# EAGLE board SparkFun NEO-F9P-Panel (EAGLE 9.6.2), part 1 of 3
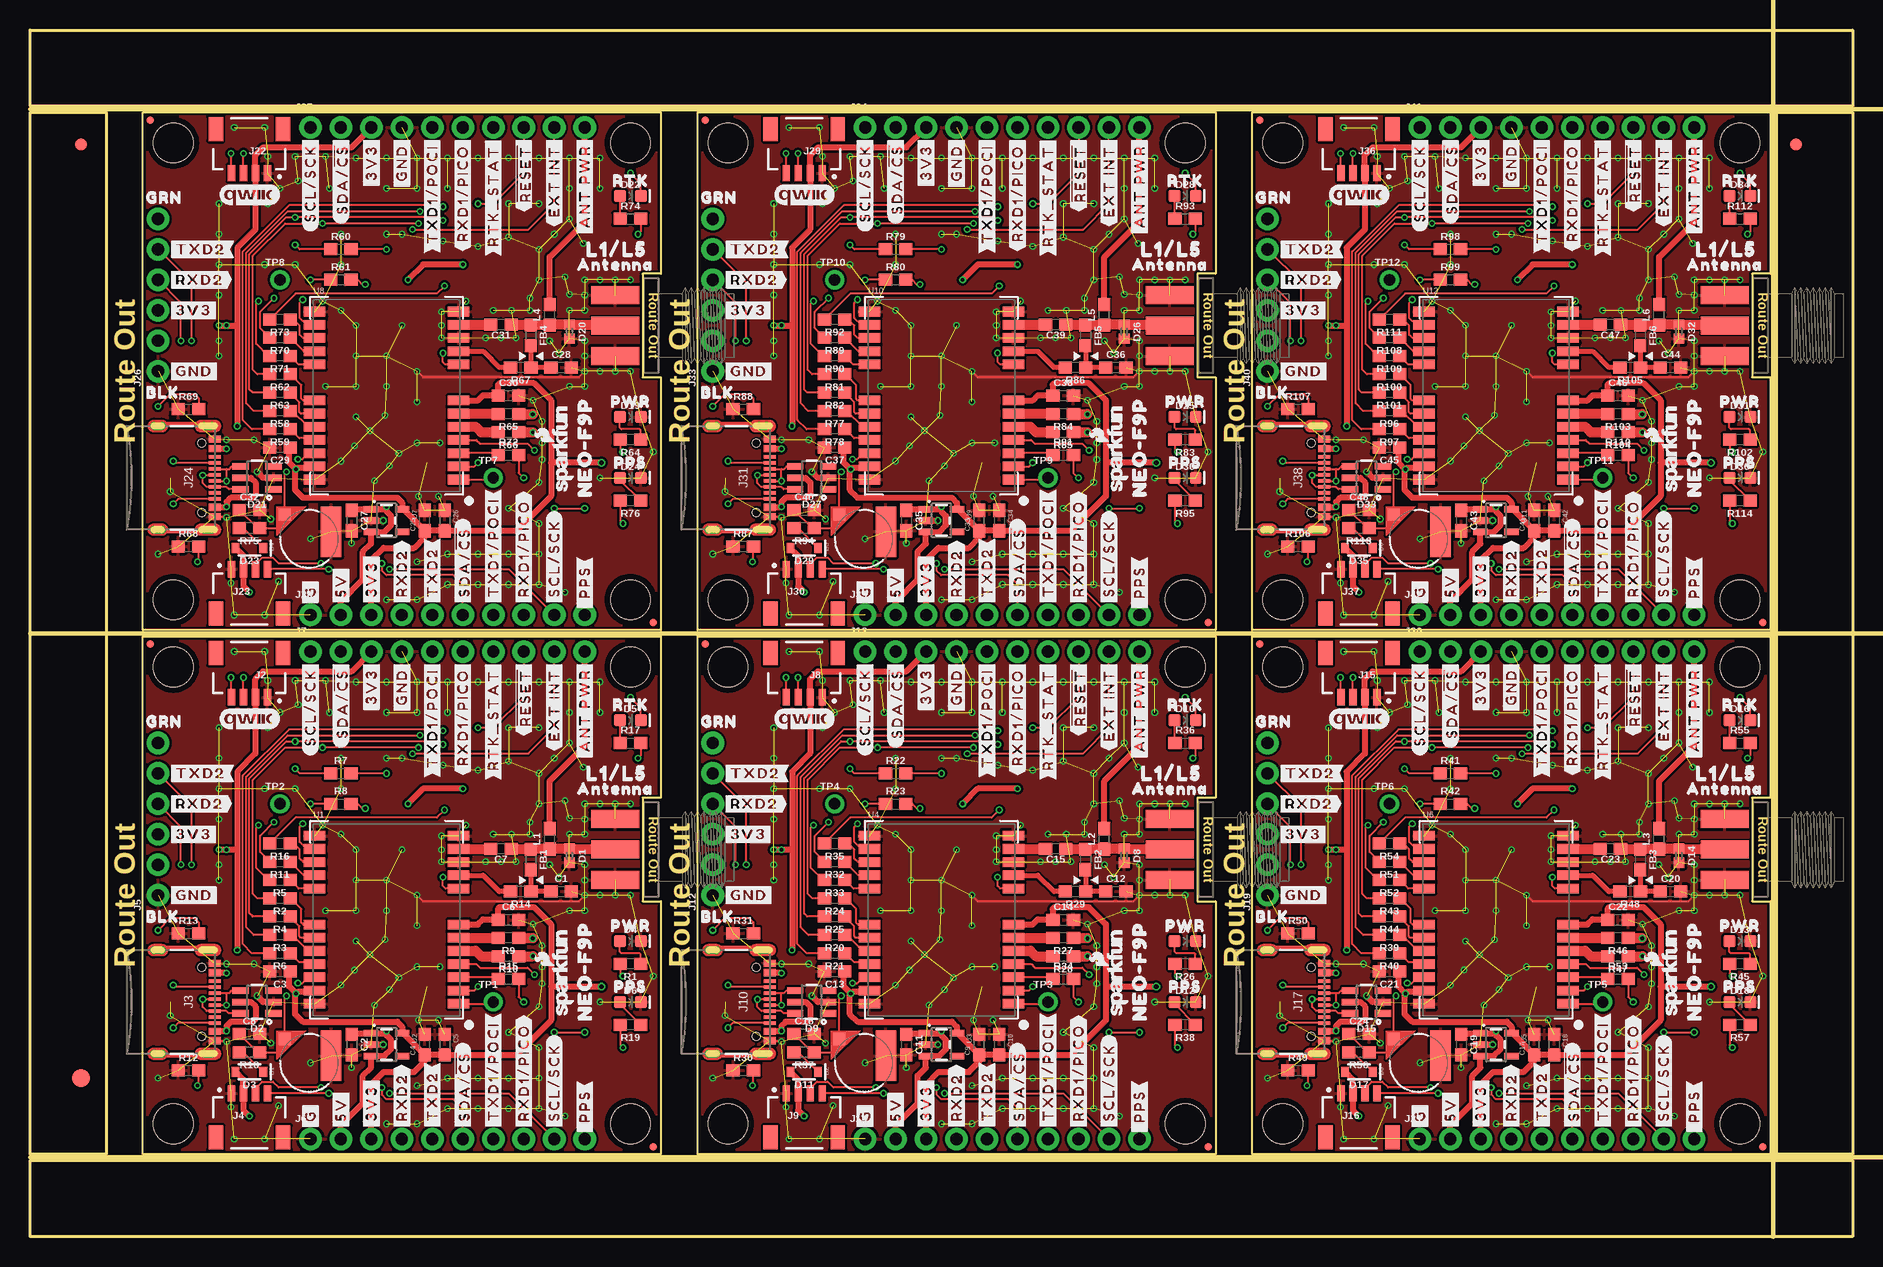
[diagram p0: board, top side]
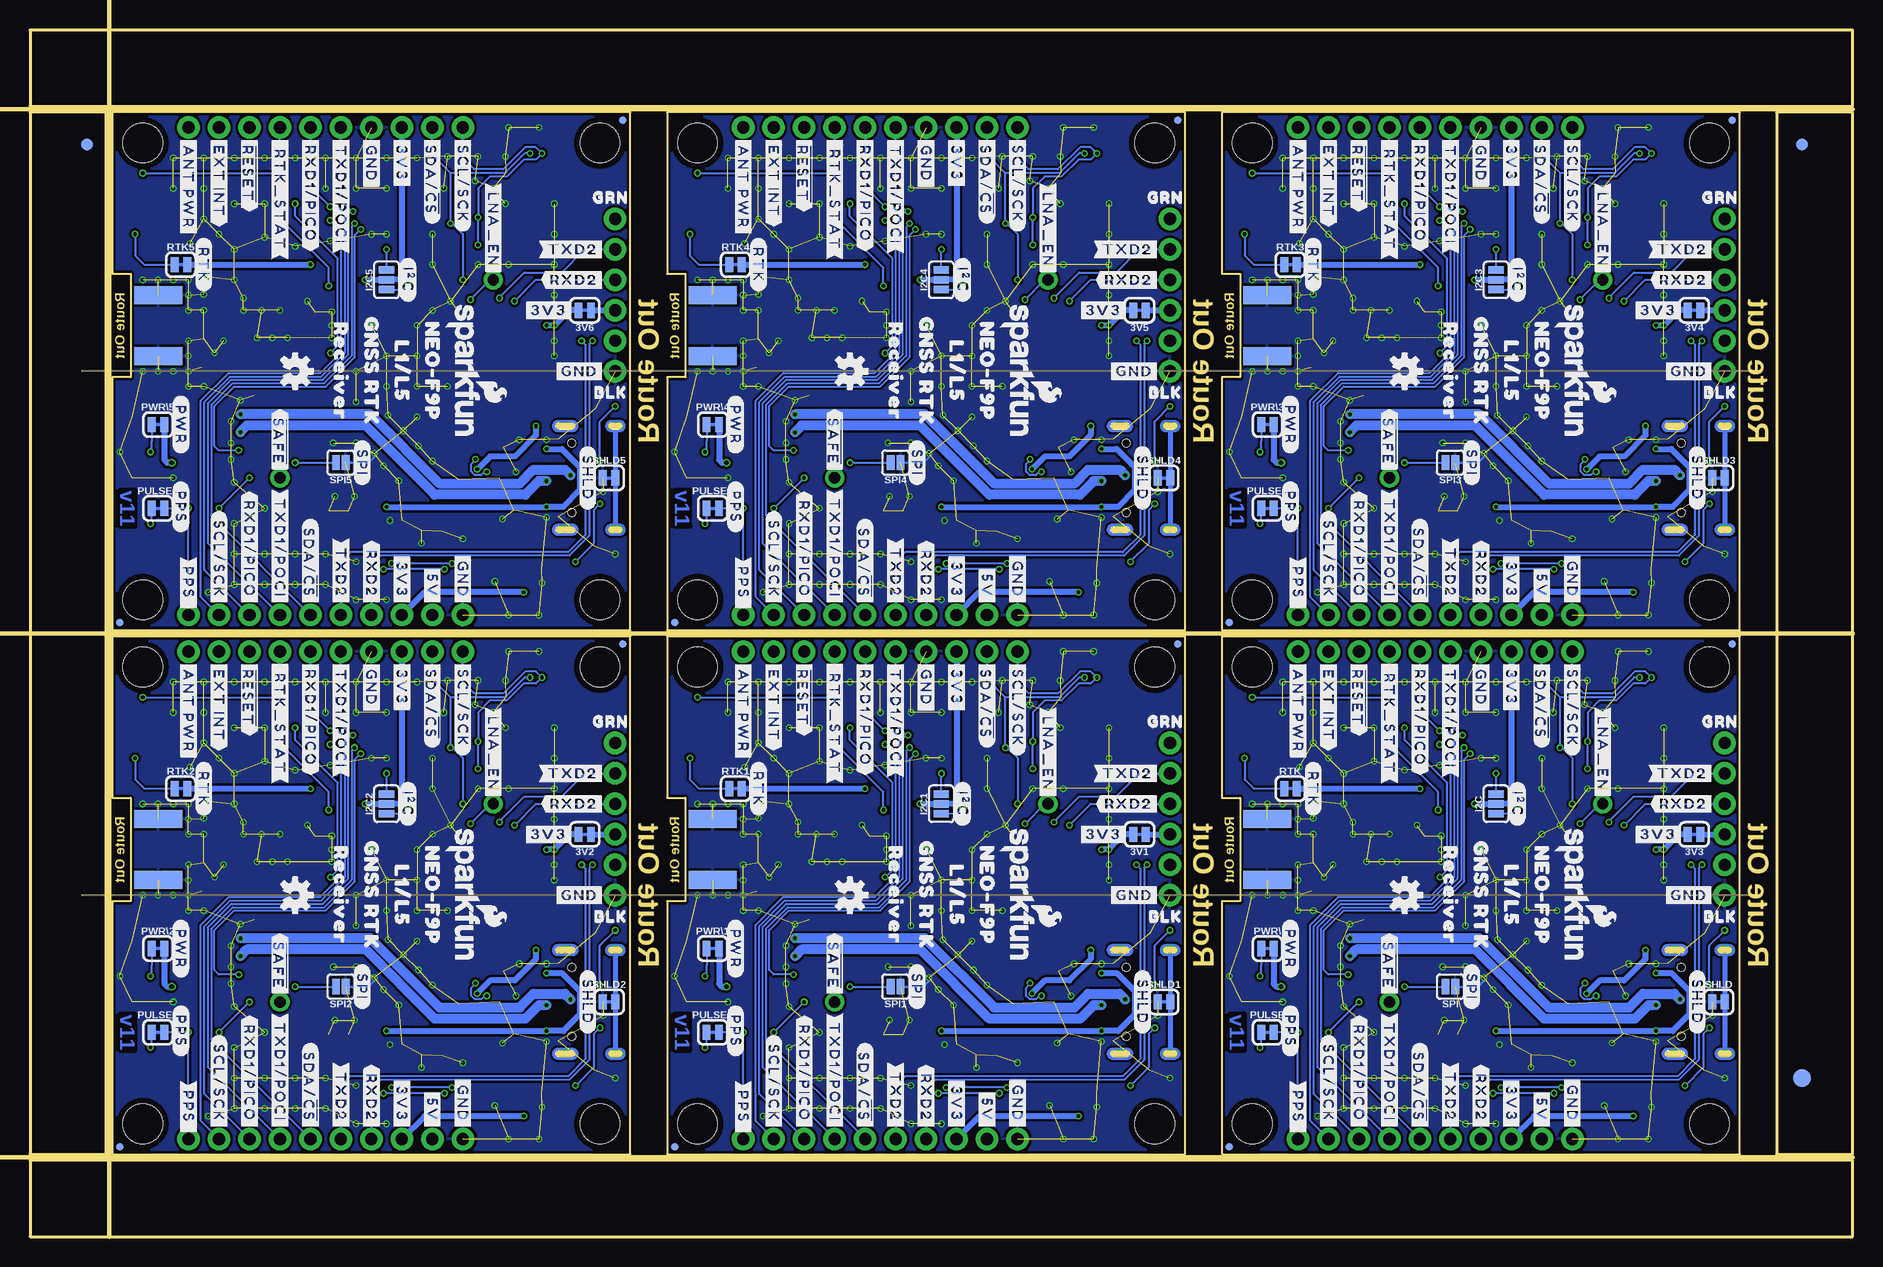
[diagram p1: board, bottom side, seen from below]

Size 151.89 x 100.58 mm. Coordinates in mm from the lower left corner, seen from the top.
Outline: 9.4,6.86 9.4,50.04 52.58,50.04 52.58,36.58 51.05,36.58 51.05,27.94 52.58,27.94 52.58,6.86 9.4,6.86
Outline: 55.63,6.86 55.63,50.04 98.81,50.04 98.81,36.58 97.28,36.58 97.28,27.94 98.81,27.94 98.81,6.86 55.63,6.86
Outline: 101.85,6.86 101.85,50.04 145.03,50.04 145.03,36.58 143.51,36.58 143.51,27.94 145.03,27.94 145.03,6.86 101.85,6.86
Outline: 9.4,50.55 9.4,93.73 52.58,93.73 52.58,80.26 51.05,80.26 51.05,71.63 52.58,71.63 52.58,50.55 9.4,50.55
Outline: 55.63,50.55 55.63,93.73 98.81,93.73 98.81,80.26 97.28,80.26 97.28,71.63 98.81,71.63 98.81,50.55 55.63,50.55
Outline: 101.85,50.55 101.85,93.73 145.03,93.73 145.03,80.26 143.51,80.26 143.51,71.63 145.03,71.63 145.03,50.55 101.85,50.55
Outline: 0,6.35 151.89,6.35 151.89,0 0,0 0,6.35
Outline: 145.54,93.73 151.89,93.73 151.89,6.86 145.54,6.86 145.54,93.73
Outline: 0,100.58 151.89,100.58 151.89,94.23 0,94.23 0,100.58
Outline: 0,93.73 6.35,93.73 6.35,6.86 0,6.86 0,93.73
Copper layers (1*16): Top 0.035mm / dielectric 1.5mm / Bottom 0.035mm
Design rules "SparkFun NEO-F9P": minimum track width 5mil, minimum drill 0.3mm, track to track 5mil, track to pad 5mil, pad to pad 5mil, via to via 5mil, smd to smd 5mil, copper to edge 7mil, drill to drill 7mil, minimum pad ring 5mil, minimum via ring 5mil, stop-mask expansion 2.5mil, vias tented up to drill 25mil, thermal gap 10mil
Net classes: 2 3.3V: width 0.508 mm
tRestrict: 12 lines
Milling: 4 lines

## Footprints (pad centres in the part's own frame; a part is rotated, then mirrored left to right if it is on the bottom)
SMT-JUMPER_2_NC_TRACE_SILK = smd 0.66 x 1.27: 1 -0.521,0; 2 0.521,0
ML414H_IV01E = smd 1 x 1: + 2.022,2.032 | smd 4.2 x 1.7: - 0.6,-1.85
0603 = smd 1.1 x 1: 1 -0.85,0; 2 0.85,0
0402 = smd 0.85 x 0.9: 1 -0.58,0; 2 0.58,0
SOT-23-6 = smd 0.55 x 1.35: 1 -0.95,-1.375; 2 0,-1.375; 3 0.95,-1.375; 4 0.95,1.375; 5 0,1.375; 6 -0.95,1.375
SOD-323 = smd 0.63 x 0.83: A 1.15,0; C -1.15,0
LED-0603 = smd 1 x 1: A -0.877,0; C 0.877,0
FIDUCIAL-1X2 = smd 1 x 1: 1 0,0
FIDUCIAL-1.5X3 = smd 1.5 x 1.5: 1 0,0
SMT-JUMPER_3_NO_SILK = smd 0.635 x 1.27: 1 -0.813,0; 2 0,0; 3 0.813,0
SMA-EDGE = smd 1.5 x 4: GND@0 -2.54,0; GND@1 2.54,0; SIG 0,0 | smd 1.5 x 4 bottom: GND@2 -2.54,0; GND@3 2.54,0
JST04_1MM_RA = smd 0.6 x 1.35: 1 -1.5,0; 2 -0.5,0; 3 0.5,0; 4 1.5,0 | smd 1.2 x 2: NC1 2.8,-3.675; NC2 -2.8,-3.675
USB-C-16P-2LAYER-PADS = smd 0.3 x 1: A5 -1.25,-0.34; A6 -0.25,-0.34; A7 0.25,-0.34; A8 1.25,-0.34; B5 1.75,-0.34; B6 0.75,-0.34; B7 -0.75,-0.34; B8 -1.75,-0.34 | smd 0.6 x 1: GND -3.225,-0.34; GND2 3.225,-0.34; VBUS1 -2.45,-0.34; VBUS2 2.45,-0.34 | drill 0.4 pad 0.6 long: SHLD1 -4.318,-0.915; SHLD2 4.318,-0.915; SHLD3 -4.318,-5.095; SHLD4 4.318,-5.095 | hole 0.65: -2.89,-1.445; 2.89,-1.445
1X06_NO_SILK = drill 1.016 pad 1.88: 1 0,0; 2 2.54,0; 3 5.08,0; 4 7.62,0; 5 10.16,0; 6 12.7,0
1X10_NO_SILK = drill 1.016 pad 1.88: 1 0,0; 2 2.54,0; 3 5.08,0; 4 7.62,0; 5 10.16,0; 6 12.7,0; 7 15.24,0; 8 17.78,0; 9 20.32,0; 10 22.86,0
STAND-OFF = hole 3.302: 0,0
MICRO-FIDUCIAL = smd 0.635 x 0.635: 1 0,0
0603_NO-CREAM = smd 1.1 x 1: 1 -0.85,0; 2 0.85,0
SMT-JUMPER_2_NO_SILK = smd 0.635 x 1.27: 1 -0.406,0; 2 0.406,0
1X01_NO_SILK = drill 0.95 pad 1.6: 1 0,0
NEO-M9N/M8T/M8U/D9S/F9P = smd 1.8 x 0.8: 1 6,-7; 2 6,-5.9; 3 6,-4.8; 4 6,-3.7; 5 6,-2.6; 6 6,-1.5; 7 6,-0.4; 8 6,2.6; 9 6,3.7; 10 6,4.8; 11 6,5.9; 12 6,7; 13 -6,7; 14 -6,5.9; 15 -6,4.8; 16 -6,3.7; 17 -6,2.6; 18 -6,-0.4; 19 -6,-1.5; 20 -6,-2.6; 21 -6,-3.7; 22 -6,-4.8; 23 -6,-5.9; 24 -6,-7
SOT23-5 = smd 0.55 x 1.2: 1 -0.95,-1.3; 2 0,-1.3; 3 0.95,-1.3; 4 0.95,1.3; 5 -0.95,1.3

## Placement (x,y rotation side)
3V1  JUMPER-SMT_2_NC_TRACE_SILK  [SMT-JUMPER_2_NC_TRACE_SILK]  59.44,33.53 180 bottom
3V2  JUMPER-SMT_2_NC_TRACE_SILK  [SMT-JUMPER_2_NC_TRACE_SILK]  105.66,33.53 180 bottom
3V3  JUMPER-SMT_2_NC_TRACE_SILK  [SMT-JUMPER_2_NC_TRACE_SILK]  13.21,33.53 180 bottom
3V4  JUMPER-SMT_2_NC_TRACE_SILK  [SMT-JUMPER_2_NC_TRACE_SILK]  13.21,77.22 180 bottom
3V5  JUMPER-SMT_2_NC_TRACE_SILK  [SMT-JUMPER_2_NC_TRACE_SILK]  59.44,77.22 180 bottom
3V6  JUMPER-SMT_2_NC_TRACE_SILK  [SMT-JUMPER_2_NC_TRACE_SILK]  105.66,77.22 180 bottom
B1  6.8MM_COIN_CELL  [ML414H_IV01E]  23.24,14.48 90 top
B2  6.8MM_COIN_CELL  [ML414H_IV01E]  69.47,14.48 90 top
B3  6.8MM_COIN_CELL  [ML414H_IV01E]  115.7,14.48 90 top
B4  6.8MM_COIN_CELL  [ML414H_IV01E]  23.24,58.17 90 top
B5  6.8MM_COIN_CELL  [ML414H_IV01E]  69.47,58.17 90 top
B6  6.8MM_COIN_CELL  [ML414H_IV01E]  115.7,58.17 90 top
C1  47pF  [0603]  44.26,28.77 0 top
C2  1.0uF  [0603]  26.8,16 270 top
C3  1.0uF  [0603]  20.83,22.1 180 top
C4  1.0uF  [0603]  32.89,16 90 top
C5  0.1uF  [0603]  34.54,16 270 top
C6  1.0uF  [0603]  39.88,26.42 0 top
C7  47pF  [0603]  39.24,32.32 180 top
C8  1.0uF  [0603]  18.29,16.89 0 top
C9  1.0uF  [0603]  79.12,16 90 top
C10  0.1uF  [0603]  80.77,16 270 top
C11  1.0uF  [0603]  73.03,16 270 top
C12  47pF  [0603]  90.49,28.77 0 top
C13  1.0uF  [0603]  67.06,22.1 180 top
C14  1.0uF  [0603]  86.11,26.42 0 top
C15  47pF  [0603]  85.47,32.32 180 top
C16  1.0uF  [0603]  64.52,16.89 0 top
C17  1.0uF  [0603]  125.35,16 90 top
C18  0.1uF  [0603]  127,16 270 top
C19  1.0uF  [0603]  119.25,16 270 top
C20  47pF  [0603]  136.72,28.77 0 top
C21  1.0uF  [0603]  113.28,22.1 180 top
C22  1.0uF  [0603]  132.33,26.42 0 top
C23  47pF  [0603]  131.7,32.32 180 top
C24  1.0uF  [0603]  110.74,16.89 0 top
C25  1.0uF  [0603]  32.89,59.69 90 top
C26  0.1uF  [0603]  34.54,59.69 270 top
C27  1.0uF  [0603]  26.8,59.69 270 top
C28  47pF  [0603]  44.26,72.45 0 top
C29  1.0uF  [0603]  20.83,65.79 180 top
C30  1.0uF  [0603]  39.88,70.1 0 top
C31  47pF  [0603]  39.24,76.01 180 top
C32  1.0uF  [0603]  18.29,60.58 0 top
C33  1.0uF  [0603]  79.12,59.69 90 top
C34  0.1uF  [0603]  80.77,59.69 270 top
C35  1.0uF  [0603]  73.03,59.69 270 top
C36  47pF  [0603]  90.49,72.45 0 top
C37  1.0uF  [0603]  67.06,65.79 180 top
C38  1.0uF  [0603]  86.11,70.1 0 top
C39  47pF  [0603]  85.47,76.01 180 top
C40  1.0uF  [0603]  64.52,60.58 0 top
C41  1.0uF  [0603]  125.35,59.69 90 top
C42  0.1uF  [0603]  127,59.69 270 top
C43  1.0uF  [0603]  119.25,59.69 270 top
C44  47pF  [0603]  136.72,72.45 0 top
C45  1.0uF  [0603]  113.28,65.79 180 top
C46  1.0uF  [0603]  132.33,70.1 0 top
C47  47pF  [0603]  131.7,76.01 180 top
C48  1.0uF  [0603]  110.74,60.58 0 top
D1  PESD0402-0402  [0402]  44.96,31.75 270 top
D2  ESD Diode  [SOT-23-6]  18.92,19.56 90 top
D3  0.5A/40V/420mV  [SOD-323]  18.29,13.72 180 top
D4  Red  [LED-0603]  50.04,24.64 0 top
D5  Blue  [LED-0603]  50.04,43.05 0 top
D6  Yellow  [LED-0603]  50.04,19.56 0 top
D7  Red  [LED-0603]  96.27,24.64 0 top
D8  PESD0402-0402  [0402]  91.19,31.75 270 top
D9  ESD Diode  [SOT-23-6]  65.15,19.56 90 top
D10  Blue  [LED-0603]  96.27,43.05 0 top
D11  0.5A/40V/420mV  [SOD-323]  64.52,13.72 180 top
D12  Yellow  [LED-0603]  96.27,19.56 0 top
D13  Red  [LED-0603]  142.49,24.64 0 top
D14  PESD0402-0402  [0402]  137.41,31.75 270 top
D15  ESD Diode  [SOT-23-6]  111.38,19.56 90 top
D16  Blue  [LED-0603]  142.49,43.05 0 top
D17  0.5A/40V/420mV  [SOD-323]  110.74,13.72 180 top
D18  Yellow  [LED-0603]  142.49,19.56 0 top
D19  Red  [LED-0603]  50.04,68.33 0 top
D20  PESD0402-0402  [0402]  44.96,75.44 270 top
D21  ESD Diode  [SOT-23-6]  18.92,63.25 90 top
D22  Blue  [LED-0603]  50.04,86.74 0 top
D23  0.5A/40V/420mV  [SOD-323]  18.29,57.4 180 top
D24  Yellow  [LED-0603]  50.04,63.25 0 top
D25  Red  [LED-0603]  96.27,68.33 0 top
D26  PESD0402-0402  [0402]  91.19,75.44 270 top
D27  ESD Diode  [SOT-23-6]  65.15,63.25 90 top
D28  Blue  [LED-0603]  96.27,86.74 0 top
D29  0.5A/40V/420mV  [SOD-323]  64.52,57.4 180 top
D30  Yellow  [LED-0603]  96.27,63.25 0 top
D31  Red  [LED-0603]  142.49,68.33 0 top
D32  PESD0402-0402  [0402]  137.41,75.44 270 top
D33  ESD Diode  [SOT-23-6]  111.38,63.25 90 top
D34  Blue  [LED-0603]  142.49,86.74 0 top
D35  0.5A/40V/420mV  [SOD-323]  110.74,57.4 180 top
D36  Yellow  [LED-0603]  142.49,63.25 0 top
E$1  [FIDUCIAL-1X2]  4.23,91.06 0 top
E$2  [FIDUCIAL-1X2]  4.23,91.06 0 bottom
E$3  [FIDUCIAL-1X2]  147.15,91.06 0 top
E$4  [FIDUCIAL-1X2]  147.15,91.06 0 bottom
E$5  [FIDUCIAL-1.5X3]  4.23,13.21 0 top
E$6  [FIDUCIAL-1.5X3]  4.23,13.21 0 bottom
FB1  30Ω/1.8A  [0603]  41.72,31.43 270 top
FB2  30Ω/1.8A  [0603]  87.95,31.43 270 top
FB3  30Ω/1.8A  [0603]  134.18,31.43 270 top
FB4  30Ω/1.8A  [0603]  41.72,75.12 270 top
FB5  30Ω/1.8A  [0603]  87.95,75.12 270 top
FB6  30Ω/1.8A  [0603]  134.18,75.12 270 top
I2C  JUMPER-SMT_3_NO_SILK  [SMT-JUMPER_3_NO_SILK]  29.72,36.07 90 bottom
I2C1  JUMPER-SMT_3_NO_SILK  [SMT-JUMPER_3_NO_SILK]  75.95,36.07 90 bottom
I2C2  JUMPER-SMT_3_NO_SILK  [SMT-JUMPER_3_NO_SILK]  122.17,36.07 90 bottom
I2C3  JUMPER-SMT_3_NO_SILK  [SMT-JUMPER_3_NO_SILK]  29.72,79.76 90 bottom
I2C4  JUMPER-SMT_3_NO_SILK  [SMT-JUMPER_3_NO_SILK]  75.95,79.76 90 bottom
I2C5  JUMPER-SMT_3_NO_SILK  [SMT-JUMPER_3_NO_SILK]  122.17,79.76 90 bottom
J1  ANTENNA-SMA-GROUNDEDEDGE_SMA  [SMA-EDGE]  48.77,32.26 270 top
J2  Qwiic Right Angle  [JST04_1MM_RA]  18.29,44.96 180 top
J3  [USB-C-16P-2LAYER-PADS]  15.75,19.56 270 top
J4  Qwiic Right Angle  [JST04_1MM_RA]  18.29,11.94 0 top
J5  [1X06_NO_SILK]  10.67,28.45 90 top
J6  [1X10_NO_SILK]  23.37,8.13 0 top
J7  [1X10_NO_SILK]  23.37,48.77 0 top
J8  Qwiic Right Angle  [JST04_1MM_RA]  64.52,44.96 180 top
J9  Qwiic Right Angle  [JST04_1MM_RA]  64.52,11.94 0 top
J10  [USB-C-16P-2LAYER-PADS]  61.98,19.56 270 top
J11  ANTENNA-SMA-GROUNDEDEDGE_SMA  [SMA-EDGE]  95,32.26 270 top
J12  [1X06_NO_SILK]  56.9,28.45 90 top
J13  [1X10_NO_SILK]  69.6,48.77 0 top
J14  [1X10_NO_SILK]  69.6,8.13 0 top
J15  Qwiic Right Angle  [JST04_1MM_RA]  110.74,44.96 180 top
J16  Qwiic Right Angle  [JST04_1MM_RA]  110.74,11.94 0 top
J17  [USB-C-16P-2LAYER-PADS]  108.2,19.56 270 top
J18  ANTENNA-SMA-GROUNDEDEDGE_SMA  [SMA-EDGE]  141.22,32.26 270 top
J19  [1X06_NO_SILK]  103.12,28.45 90 top
J20  [1X10_NO_SILK]  115.82,48.77 0 top
J21  [1X10_NO_SILK]  115.82,8.13 0 top
J22  Qwiic Right Angle  [JST04_1MM_RA]  18.29,88.65 180 top
J23  Qwiic Right Angle  [JST04_1MM_RA]  18.29,55.63 0 top
J24  [USB-C-16P-2LAYER-PADS]  15.75,63.25 270 top
J25  ANTENNA-SMA-GROUNDEDEDGE_SMA  [SMA-EDGE]  48.77,75.95 270 top
J26  [1X06_NO_SILK]  10.67,72.14 90 top
J27  [1X10_NO_SILK]  23.37,92.46 0 top
J28  [1X10_NO_SILK]  23.37,51.82 0 top
J29  Qwiic Right Angle  [JST04_1MM_RA]  64.52,88.65 180 top
J30  Qwiic Right Angle  [JST04_1MM_RA]  64.52,55.63 0 top
J31  [USB-C-16P-2LAYER-PADS]  61.98,63.25 270 top
J32  ANTENNA-SMA-GROUNDEDEDGE_SMA  [SMA-EDGE]  95,75.95 270 top
J33  [1X06_NO_SILK]  56.9,72.14 90 top
J34  [1X10_NO_SILK]  69.6,92.46 0 top
J35  [1X10_NO_SILK]  69.6,51.82 0 top
J36  Qwiic Right Angle  [JST04_1MM_RA]  110.74,88.65 180 top
J37  Qwiic Right Angle  [JST04_1MM_RA]  110.74,55.63 0 top
J38  [USB-C-16P-2LAYER-PADS]  108.2,63.25 270 top
J39  ANTENNA-SMA-GROUNDEDEDGE_SMA  [SMA-EDGE]  141.22,75.95 270 top
J40  [1X06_NO_SILK]  103.12,72.14 90 top
J41  [1X10_NO_SILK]  115.82,92.46 0 top
J42  [1X10_NO_SILK]  115.82,51.82 0 top
JP1  STAND-OFF  [STAND-OFF]  58.17,47.47 0 top
JP2  STAND-OFF  [STAND-OFF]  96.27,47.47 0 top
JP3  FIDUCIALUFIDUCIAL  [MICRO-FIDUCIAL]  98.17,7.49 0 top
JP4  FIDUCIALUFIDUCIAL  [MICRO-FIDUCIAL]  56.26,49.38 0 top
JP5  FIDUCIALUFIDUCIAL  [MICRO-FIDUCIAL]  98.17,7.49 0 bottom
JP6  FIDUCIALUFIDUCIAL  [MICRO-FIDUCIAL]  56.26,49.38 0 bottom
JP7  STAND-OFF  [STAND-OFF]  58.17,9.4 0 top
JP8  STAND-OFF  [STAND-OFF]  96.27,9.4 0 top
JP9  STAND-OFF  [STAND-OFF]  104.39,47.47 0 top
JP10  STAND-OFF  [STAND-OFF]  142.49,47.47 0 top
JP11  FIDUCIALUFIDUCIAL  [MICRO-FIDUCIAL]  144.4,7.49 0 top
JP12  FIDUCIALUFIDUCIAL  [MICRO-FIDUCIAL]  102.49,49.38 0 top
JP13  FIDUCIALUFIDUCIAL  [MICRO-FIDUCIAL]  144.4,7.49 0 bottom
JP14  FIDUCIALUFIDUCIAL  [MICRO-FIDUCIAL]  102.49,49.38 0 bottom
JP15  STAND-OFF  [STAND-OFF]  104.39,9.4 0 top
JP16  STAND-OFF  [STAND-OFF]  142.49,9.4 0 top
JP17  STAND-OFF  [STAND-OFF]  11.94,91.16 0 top
JP18  STAND-OFF  [STAND-OFF]  50.04,91.16 0 top
JP19  FIDUCIALUFIDUCIAL  [MICRO-FIDUCIAL]  51.94,51.18 0 top
JP20  FIDUCIALUFIDUCIAL  [MICRO-FIDUCIAL]  10.03,93.07 0 top
JP21  FIDUCIALUFIDUCIAL  [MICRO-FIDUCIAL]  51.94,7.49 0 top
JP22  FIDUCIALUFIDUCIAL  [MICRO-FIDUCIAL]  51.94,51.18 0 bottom
JP23  FIDUCIALUFIDUCIAL  [MICRO-FIDUCIAL]  10.03,93.07 0 bottom
JP24  STAND-OFF  [STAND-OFF]  11.94,53.09 0 top
JP25  STAND-OFF  [STAND-OFF]  50.04,53.09 0 top
JP26  STAND-OFF  [STAND-OFF]  58.17,91.16 0 top
JP27  STAND-OFF  [STAND-OFF]  96.27,91.16 0 top
JP28  FIDUCIALUFIDUCIAL  [MICRO-FIDUCIAL]  98.17,51.18 0 top
JP29  FIDUCIALUFIDUCIAL  [MICRO-FIDUCIAL]  56.26,93.07 0 top
JP30  FIDUCIALUFIDUCIAL  [MICRO-FIDUCIAL]  98.17,51.18 0 bottom
JP31  STAND-OFF  [STAND-OFF]  11.94,47.47 0 top
JP32  FIDUCIALUFIDUCIAL  [MICRO-FIDUCIAL]  56.26,93.07 0 bottom
JP33  STAND-OFF  [STAND-OFF]  58.17,53.09 0 top
JP34  STAND-OFF  [STAND-OFF]  96.27,53.09 0 top
JP35  STAND-OFF  [STAND-OFF]  104.39,91.16 0 top
JP36  STAND-OFF  [STAND-OFF]  142.49,91.16 0 top
JP37  FIDUCIALUFIDUCIAL  [MICRO-FIDUCIAL]  144.4,51.18 0 top
JP38  FIDUCIALUFIDUCIAL  [MICRO-FIDUCIAL]  102.49,93.07 0 top
JP39  FIDUCIALUFIDUCIAL  [MICRO-FIDUCIAL]  144.4,51.18 0 bottom
JP40  FIDUCIALUFIDUCIAL  [MICRO-FIDUCIAL]  102.49,93.07 0 bottom
JP41  STAND-OFF  [STAND-OFF]  50.04,47.47 0 top
JP42  STAND-OFF  [STAND-OFF]  104.39,53.09 0 top
JP43  STAND-OFF  [STAND-OFF]  142.49,53.09 0 top
JP61  FIDUCIALUFIDUCIAL  [MICRO-FIDUCIAL]  10.03,49.38 0 top
JP71  FIDUCIALUFIDUCIAL  [MICRO-FIDUCIAL]  51.94,7.49 0 bottom
JP81  FIDUCIALUFIDUCIAL  [MICRO-FIDUCIAL]  10.03,49.38 0 bottom
JP91  STAND-OFF  [STAND-OFF]  11.94,9.4 0 top
JP101  STAND-OFF  [STAND-OFF]  50.04,9.4 0 top
L1  DNP  [0603_NO-CREAM]  43.31,33.15 90 top
L2  DNP  [0603_NO-CREAM]  89.53,33.15 90 top
L3  DNP  [0603_NO-CREAM]  135.76,33.15 90 top
L4  DNP  [0603_NO-CREAM]  43.31,76.84 90 top
L5  DNP  [0603_NO-CREAM]  89.53,76.84 90 top
L6  DNP  [0603_NO-CREAM]  135.76,76.84 90 top
LOGO1  SFE_LOGO_NAME_FLAME7_MM  [SFE_LOGO_NAME_FLAME_7MM]  90.55,21.97 90 top
LOGO2  SFE_LOGO_NAME_FLAME.1_INCH  [SFE_LOGO_NAME_FLAME_.1]  23.37,28.45 270 bottom
LOGO3  SFE_LOGO_NAME_FLAME7_MM  [SFE_LOGO_NAME_FLAME_7MM]  44.32,21.97 90 top
LOGO4  OSHW-LOGOS  [OSHW-LOGO-S]  37.34,28.45 270 bottom
LOGO5  QWIIC_LOGO_5MM  [QWIIC_5MM]  18.29,43.18 0 top
LOGO6  SFE_LOGO_NAME_FLAME.1_INCH  [SFE_LOGO_NAME_FLAME_.1]  69.6,28.45 270 bottom
LOGO7  OSHW-LOGOS  [OSHW-LOGO-S]  83.57,28.45 270 bottom
LOGO8  QWIIC_LOGO_5MM  [QWIIC_5MM]  64.52,43.18 0 top
LOGO9  SFE_LOGO_NAME_FLAME7_MM  [SFE_LOGO_NAME_FLAME_7MM]  136.78,21.97 90 top
LOGO10  SFE_LOGO_NAME_FLAME.1_INCH  [SFE_LOGO_NAME_FLAME_.1]  115.82,28.45 270 bottom
LOGO11  OSHW-LOGOS  [OSHW-LOGO-S]  129.79,28.45 270 bottom
LOGO12  QWIIC_LOGO_5MM  [QWIIC_5MM]  110.74,43.18 0 top
LOGO13  SFE_LOGO_NAME_FLAME7_MM  [SFE_LOGO_NAME_FLAME_7MM]  44.32,65.66 90 top
LOGO14  SFE_LOGO_NAME_FLAME.1_INCH  [SFE_LOGO_NAME_FLAME_.1]  23.37,72.14 270 bottom
LOGO15  OSHW-LOGOS  [OSHW-LOGO-S]  37.34,72.14 270 bottom
LOGO16  QWIIC_LOGO_5MM  [QWIIC_5MM]  18.29,86.87 0 top
LOGO17  SFE_LOGO_NAME_FLAME7_MM  [SFE_LOGO_NAME_FLAME_7MM]  90.55,65.66 90 top
LOGO18  SFE_LOGO_NAME_FLAME.1_INCH  [SFE_LOGO_NAME_FLAME_.1]  69.6,72.14 270 bottom
LOGO19  OSHW-LOGOS  [OSHW-LOGO-S]  83.57,72.14 270 bottom
LOGO20  QWIIC_LOGO_5MM  [QWIIC_5MM]  64.52,86.87 0 top
LOGO21  SFE_LOGO_NAME_FLAME7_MM  [SFE_LOGO_NAME_FLAME_7MM]  136.78,65.66 90 top
LOGO22  SFE_LOGO_NAME_FLAME.1_INCH  [SFE_LOGO_NAME_FLAME_.1]  115.82,72.14 270 bottom
LOGO23  OSHW-LOGOS  [OSHW-LOGO-S]  129.79,72.14 270 bottom
LOGO24  QWIIC_LOGO_5MM  [QWIIC_5MM]  110.74,86.87 0 top
PULSE  JUMPER-SMT_2_NC_TRACE_SILK  [SMT-JUMPER_2_NC_TRACE_SILK]  48.77,17.02 0 bottom
PULSE1  JUMPER-SMT_2_NC_TRACE_SILK  [SMT-JUMPER_2_NC_TRACE_SILK]  95,17.02 0 bottom
PULSE2  JUMPER-SMT_2_NC_TRACE_SILK  [SMT-JUMPER_2_NC_TRACE_SILK]  141.22,17.02 0 bottom
PULSE3  JUMPER-SMT_2_NC_TRACE_SILK  [SMT-JUMPER_2_NC_TRACE_SILK]  48.77,60.71 0 bottom
PULSE4  JUMPER-SMT_2_NC_TRACE_SILK  [SMT-JUMPER_2_NC_TRACE_SILK]  95,60.71 0 bottom
PULSE5  JUMPER-SMT_2_NC_TRACE_SILK  [SMT-JUMPER_2_NC_TRACE_SILK]  141.22,60.71 0 bottom
PWR\  JUMPER-SMT_2_NC_TRACE_SILK  [SMT-JUMPER_2_NC_TRACE_SILK]  48.77,24 0 bottom
PWR\1  JUMPER-SMT_2_NC_TRACE_SILK  [SMT-JUMPER_2_NC_TRACE_SILK]  95,24 0 bottom
PWR\2  JUMPER-SMT_2_NC_TRACE_SILK  [SMT-JUMPER_2_NC_TRACE_SILK]  141.22,24 0 bottom
PWR\3  JUMPER-SMT_2_NC_TRACE_SILK  [SMT-JUMPER_2_NC_TRACE_SILK]  48.77,67.69 0 bottom
PWR\4  JUMPER-SMT_2_NC_TRACE_SILK  [SMT-JUMPER_2_NC_TRACE_SILK]  95,67.69 0 bottom
PWR\5  JUMPER-SMT_2_NC_TRACE_SILK  [SMT-JUMPER_2_NC_TRACE_SILK]  141.22,67.69 0 bottom
R1  1k  [0603]  50.04,22.73 180 top
R2  33  [0603]  20.83,28.19 180 top
R3  33  [0603]  20.83,25.15 180 top
R4  33  [0603]  20.83,26.67 180 top
R5  33  [0603]  20.83,29.72 180 top
R6  33  [0603]  20.83,23.62 180 top
R7  2.2k  [0603]  25.91,38.61 0 top
R8  2.2k  [0603]  25.91,36.07 0 top
R9  27  [0603]  39.88,24.89 180 top
R10  27  [0603]  39.88,23.37 180 top
R11  33  [0603]  20.83,31.24 180 top
R12  5.1k  [0603]  13.21,13.84 0 top
R13  5.1k  [0603]  13.21,25.27 0 top
R14  10  [0603]  40.89,28.77 180 top
R15  33  [0603]  39.88,21.46 0 top
R16  33  [0603]  20.83,32.77 180 top
R17  2.2k  [0603]  50.04,41.15 0 top
R18  1k  [0603]  18.29,15.37 180 top
R19  2.2k  [0603]  50.04,17.65 180 top
R20  33  [0603]  67.06,25.15 180 top
R21  33  [0603]  67.06,23.62 180 top
R22  2.2k  [0603]  72.14,38.61 0 top
R23  2.2k  [0603]  72.14,36.07 0 top
R24  33  [0603]  67.06,28.19 180 top
R25  33  [0603]  67.06,26.67 180 top
R26  1k  [0603]  96.27,22.73 180 top
R27  27  [0603]  86.11,24.89 180 top
R28  27  [0603]  86.11,23.37 180 top
R29  10  [0603]  87.12,28.77 180 top
R30  5.1k  [0603]  59.44,13.84 0 top
R31  5.1k  [0603]  59.44,25.27 0 top
R32  33  [0603]  67.06,31.24 180 top
R33  33  [0603]  67.06,29.72 180 top
R34  33  [0603]  86.11,21.46 0 top
R35  33  [0603]  67.06,32.77 180 top
R36  2.2k  [0603]  96.27,41.15 0 top
R37  1k  [0603]  64.52,15.37 180 top
R38  2.2k  [0603]  96.27,17.65 180 top
R39  33  [0603]  113.28,25.15 180 top
R40  33  [0603]  113.28,23.62 180 top
R41  2.2k  [0603]  118.36,38.61 0 top
R42  2.2k  [0603]  118.36,36.07 0 top
R43  33  [0603]  113.28,28.19 180 top
R44  33  [0603]  113.28,26.67 180 top
R45  1k  [0603]  142.49,22.73 180 top
R46  27  [0603]  132.33,24.89 180 top
R47  27  [0603]  132.33,23.37 180 top
R48  10  [0603]  133.35,28.77 180 top
R49  5.1k  [0603]  105.66,13.84 0 top
R50  5.1k  [0603]  105.66,25.27 0 top
R51  33  [0603]  113.28,31.24 180 top
R52  33  [0603]  113.28,29.72 180 top
R53  33  [0603]  132.33,21.46 0 top
R54  33  [0603]  113.28,32.77 180 top
R55  2.2k  [0603]  142.49,41.15 0 top
R56  1k  [0603]  110.74,15.37 180 top
R57  2.2k  [0603]  142.49,17.65 180 top
R58  33  [0603]  20.83,68.83 180 top
R59  33  [0603]  20.83,67.31 180 top
R60  2.2k  [0603]  25.91,82.3 0 top
R61  2.2k  [0603]  25.91,79.76 0 top
R62  33  [0603]  20.83,71.88 180 top
R63  33  [0603]  20.83,70.36 180 top
R64  1k  [0603]  50.04,66.42 180 top
R65  27  [0603]  39.88,68.58 180 top
R66  27  [0603]  39.88,67.06 180 top
R67  10  [0603]  40.89,72.45 180 top
R68  5.1k  [0603]  13.21,57.53 0 top
R69  5.1k  [0603]  13.21,68.96 0 top
R70  33  [0603]  20.83,74.93 180 top
R71  33  [0603]  20.83,73.41 180 top
R72  33  [0603]  39.88,65.15 0 top
R73  33  [0603]  20.83,76.45 180 top
R74  2.2k  [0603]  50.04,84.84 0 top
R75  1k  [0603]  18.29,59.05 180 top
R76  2.2k  [0603]  50.04,61.34 180 top
R77  33  [0603]  67.06,68.83 180 top
R78  33  [0603]  67.06,67.31 180 top
R79  2.2k  [0603]  72.14,82.3 0 top
R80  2.2k  [0603]  72.14,79.76 0 top
R81  33  [0603]  67.06,71.88 180 top
R82  33  [0603]  67.06,70.36 180 top
R83  1k  [0603]  96.27,66.42 180 top
R84  27  [0603]  86.11,68.58 180 top
R85  27  [0603]  86.11,67.06 180 top
R86  10  [0603]  87.12,72.45 180 top
R87  5.1k  [0603]  59.44,57.53 0 top
R88  5.1k  [0603]  59.44,68.96 0 top
R89  33  [0603]  67.06,74.93 180 top
R90  33  [0603]  67.06,73.41 180 top
R91  33  [0603]  86.11,65.15 0 top
R92  33  [0603]  67.06,76.45 180 top
R93  2.2k  [0603]  96.27,84.84 0 top
R94  1k  [0603]  64.52,59.05 180 top
R95  2.2k  [0603]  96.27,61.34 180 top
R96  33  [0603]  113.28,68.83 180 top
R97  33  [0603]  113.28,67.31 180 top
R98  2.2k  [0603]  118.36,82.3 0 top
R99  2.2k  [0603]  118.36,79.76 0 top
R100  33  [0603]  113.28,71.88 180 top
R101  33  [0603]  113.28,70.36 180 top
R102  1k  [0603]  142.49,66.42 180 top
R103  27  [0603]  132.33,68.58 180 top
R104  27  [0603]  132.33,67.06 180 top
R105  10  [0603]  133.35,72.45 180 top
R106  5.1k  [0603]  105.66,57.53 0 top
R107  5.1k  [0603]  105.66,68.96 0 top
R108  33  [0603]  113.28,74.93 180 top
R109  33  [0603]  113.28,73.41 180 top
R110  33  [0603]  132.33,65.15 0 top
R111  33  [0603]  113.28,76.45 180 top
R112  2.2k  [0603]  142.49,84.84 0 top
R113  1k  [0603]  110.74,59.05 180 top
R114  2.2k  [0603]  142.49,61.34 180 top
RTK  JUMPER-SMT_2_NC_TRACE_SILK  [SMT-JUMPER_2_NC_TRACE_SILK]  46.86,37.34 0 bottom
RTK1  JUMPER-SMT_2_NC_TRACE_SILK  [SMT-JUMPER_2_NC_TRACE_SILK]  93.09,37.34 0 bottom
RTK2  JUMPER-SMT_2_NC_TRACE_SILK  [SMT-JUMPER_2_NC_TRACE_SILK]  139.32,37.34 0 bottom
RTK3  JUMPER-SMT_2_NC_TRACE_SILK  [SMT-JUMPER_2_NC_TRACE_SILK]  46.86,81.03 0 bottom
RTK4  JUMPER-SMT_2_NC_TRACE_SILK  [SMT-JUMPER_2_NC_TRACE_SILK]  93.09,81.03 0 bottom
RTK5  JUMPER-SMT_2_NC_TRACE_SILK  [SMT-JUMPER_2_NC_TRACE_SILK]  139.32,81.03 0 bottom
SHLD  JUMPER-SMT_2_NC_TRACE_SILK  [SMT-JUMPER_2_NC_TRACE_SILK]  11.18,19.56 0 bottom
SHLD1  JUMPER-SMT_2_NC_TRACE_SILK  [SMT-JUMPER_2_NC_TRACE_SILK]  57.4,19.56 0 bottom
SHLD2  JUMPER-SMT_2_NC_TRACE_SILK  [SMT-JUMPER_2_NC_TRACE_SILK]  103.63,19.56 0 bottom
SHLD3  JUMPER-SMT_2_NC_TRACE_SILK  [SMT-JUMPER_2_NC_TRACE_SILK]  11.18,63.25 0 bottom
SHLD4  JUMPER-SMT_2_NC_TRACE_SILK  [SMT-JUMPER_2_NC_TRACE_SILK]  57.4,63.25 0 bottom
SHLD5  JUMPER-SMT_2_NC_TRACE_SILK  [SMT-JUMPER_2_NC_TRACE_SILK]  103.63,63.25 0 bottom
SPI  JUMPER-SMT_2_NO_SILK  [SMT-JUMPER_2_NO_SILK]  33.53,20.83 180 bottom
SPI1  JUMPER-SMT_2_NO_SILK  [SMT-JUMPER_2_NO_SILK]  79.76,20.83 180 bottom
SPI2  JUMPER-SMT_2_NO_SILK  [SMT-JUMPER_2_NO_SILK]  125.98,20.83 180 bottom
SPI3  JUMPER-SMT_2_NO_SILK  [SMT-JUMPER_2_NO_SILK]  33.53,64.52 180 bottom
SPI4  JUMPER-SMT_2_NO_SILK  [SMT-JUMPER_2_NO_SILK]  79.76,64.52 180 bottom
SPI5  JUMPER-SMT_2_NO_SILK  [SMT-JUMPER_2_NO_SILK]  125.98,64.52 180 bottom
TP1  TEST-POINTPOGO_PTH  [1X01_NO_SILK]  38.61,19.56 0 top
TP2  TEST-POINTPOGO_PTH  [1X01_NO_SILK]  20.83,36.07 0 top
TP3  TEST-POINTPOGO_PTH  [1X01_NO_SILK]  84.84,19.56 0 top
TP4  TEST-POINTPOGO_PTH  [1X01_NO_SILK]  67.06,36.07 0 top
TP5  TEST-POINTPOGO_PTH  [1X01_NO_SILK]  131.06,19.56 0 top
TP6  TEST-POINTPOGO_PTH  [1X01_NO_SILK]  113.28,36.07 0 top
TP7  TEST-POINTPOGO_PTH  [1X01_NO_SILK]  38.61,63.25 0 top
TP8  TEST-POINTPOGO_PTH  [1X01_NO_SILK]  20.83,79.76 0 top
TP9  TEST-POINTPOGO_PTH  [1X01_NO_SILK]  84.84,63.25 0 top
TP10  TEST-POINTPOGO_PTH  [1X01_NO_SILK]  67.06,79.76 0 top
TP11  TEST-POINTPOGO_PTH  [1X01_NO_SILK]  131.06,63.25 0 top
TP12  TEST-POINTPOGO_PTH  [1X01_NO_SILK]  113.28,79.76 0 top
U1  U-BLOX_NEO-F9P-15B  [NEO-M9N/M8T/M8U/D9S/F9P]  29.72,26.42 0 top
U2  3.3V  [SOT23-5]  29.72,16 270 top
U3  3.3V  [SOT23-5]  75.95,16 270 top
U4  U-BLOX_NEO-F9P-15B  [NEO-M9N/M8T/M8U/D9S/F9P]  75.95,26.42 0 top
U5  3.3V  [SOT23-5]  122.17,16 270 top
U6  U-BLOX_NEO-F9P-15B  [NEO-M9N/M8T/M8U/D9S/F9P]  122.17,26.42 0 top
U7  3.3V  [SOT23-5]  29.72,59.69 270 top
U8  U-BLOX_NEO-F9P-15B  [NEO-M9N/M8T/M8U/D9S/F9P]  29.72,70.1 0 top
U9  3.3V  [SOT23-5]  75.95,59.69 270 top
U10  U-BLOX_NEO-F9P-15B  [NEO-M9N/M8T/M8U/D9S/F9P]  75.95,70.1 0 top
U11  3.3V  [SOT23-5]  122.17,59.69 270 top
U12  U-BLOX_NEO-F9P-15B  [NEO-M9N/M8T/M8U/D9S/F9P]  122.17,70.1 0 top
U$1  [#GND#0]  57.66,28.45 0 top
U$2  [#GND#0]  11.43,28.45 0 top
U$3  [#GND#0]  30.99,48.01 270 bottom
U$4  [#GND#1]  30.99,48.01 90 top
U$5  [#GND#1]  11.43,28.45 0 bottom
U$6  [#GND#1]  23.37,8.89 270 bottom
U$7  [#TXD2#0]  11.43,38.61 0 top
U$8  [#TXD2#0]  33.53,8.89 90 top
U$9  [#TXD2#3]  33.53,8.89 270 bottom
U$10  [#TXD2#3]  11.43,38.61 0 bottom
U$11  [#RXD2#0]  30.99,8.89 90 top
U$12  [#RXD2#0]  11.43,36.07 0 top
U$13  [#RXD2#3]  11.43,36.07 0 bottom
U$14  [#RTK_STAT#0]  38.61,43.05 90 top
U$15  [#RXD2#3]  30.99,8.89 270 bottom
U$16  [BLK0]  11.05,26.67 0 top
U$17  [BLK0]  11.05,26.67 0 bottom
U$18  [GRN0]  11.18,42.93 0 top
U$19  [GRN0]  11.05,42.93 0 bottom
U$20  [#5V#0]  25.91,8.89 90 top
U$21  [#5V#6]  25.91,8.89 270 bottom
U$22  [#3V3#0]  28.45,8.89 90 top
U$23  [#3V3#0]  28.45,48.01 270 bottom
U$24  [#3V3#4]  28.45,8.89 270 bottom
U$25  [#3V3#4]  28.45,48.01 90 top
U$26  [#SDA##CS##0]  36.07,8.89 90 top
U$27  [#SDA##CS##0]  25.91,48.01 270 bottom
U$28  [#SDA##CS##1]  36.07,8.89 270 bottom
U$29  [#SDA##CS##1]  25.91,48.01 90 top
U$30  [#TXD1#POCI#0]  38.61,8.89 90 top
U$31  [#TXD1#POCI#0]  33.53,48.01 270 bottom
U$32  [#TXD1#POCI#2]  33.53,48.01 90 top
U$33  [#TXD1#POCI#2]  38.61,8.89 270 bottom
U$34  [#RXD1#PICO#0]  41.15,8.89 90 top
U$35  [#RXD1#PICO#0]  36.07,48.01 270 bottom
U$36  [#RXD1#PICO#2]  36.07,48.01 90 top
U$37  [#RXD1#PICO#2]  41.15,8.89 270 bottom
U$38  [#_RTK_STAT#0]  38.61,42.93 270 bottom
U$39  [#SCL#SCK#0]  43.69,8.89 90 top
U$40  [#SCL#SCK#0]  23.37,48.01 270 bottom
U$41  [#SCL#SCK#1]  23.37,48.01 90 top
U$42  [#SCL#SCK#1]  43.69,8.89 270 bottom
U$43  [#RTK#0]  44.96,37.34 270 bottom
U$44  [L1#L50]  48.89,38.61 0 top
U$45  [##RESET##0]  41.15,48.01 90 top
U$46  [##RESET##1]  41.15,48.01 270 bottom
U$47  [#EXT_INT#0]  43.69,48.01 90 top
U$48  [#EXT_INT#1]  43.69,48.01 270 bottom
U$49  [PWR0]  50.04,25.91 0 top
U$50  [#PWR#0]  46.86,24 270 bottom
U$51  [#SPI#0]  31.75,20.83 270 bottom
U$52  [#I�C#0]  27.94,36.07 270 bottom
U$53  [#SHLD#0]  12.95,19.56 270 bottom
U$54  [RTK0]  50.04,44.32 0 top
U$55  [#G#0]  23.37,10.03 90 top
U$56  [#3V3#0]  11.43,33.53 0 top
U$57  [#3V3#0]  18.41,33.53 0 bottom
U$58  [#ANT_PWR#0]  46.23,48.01 90 top
U$59  [#ANT_PWR#1]  46.23,48.01 270 bottom
U$60  [NEO#F9P0]  25.91,28.45 270 bottom
U$61  [NEO#F9P0]  46.23,22.1 90 top
U$62  [#GND#0]  77.22,48.01 270 bottom
U$63  [ANTENNA0]  48.77,37.34 0 top
U$64  [L1#L50]  28.45,28.45 270 bottom
U$65  [GNSS_RTK0]  30.99,28.45 270 bottom
U$66  [RECEIVER0]  33.53,28.45 270 bottom
U$67  [#LNA_EN#0]  20.83,40.26 270 bottom
U$68  [PPS0]  50.04,20.83 0 top
U$69  [#PPS#0]  46.86,17.14 270 bottom
U$70  [#_PPS#0]  46.23,10.67 90 top
U$71  [#PPS_#0]  46.23,10.67 270 bottom
U$72  [##SAFE##0]  38.61,22.61 270 bottom
U$73  [#GND#1]  77.22,48.01 90 top
U$74  [#GND#1]  57.66,28.45 0 bottom
U$75  [#GND#1]  69.6,8.89 270 bottom
U$76  [#TXD2#0]  57.66,38.61 0 top
U$77  [#TXD2#0]  79.76,8.89 90 top
U$78  [#TXD2#3]  79.76,8.89 270 bottom
U$79  [#TXD2#3]  57.66,38.61 0 bottom
U$80  [#RXD2#0]  77.22,8.89 90 top
U$81  [#RXD2#0]  57.66,36.07 0 top
U$82  [#RXD2#3]  57.66,36.07 0 bottom
U$83  [#RXD2#3]  77.22,8.89 270 bottom
U$84  [BLK0]  57.28,26.67 0 top
U$85  [BLK0]  57.28,26.67 0 bottom
U$86  [GRN0]  57.4,42.93 0 top
U$87  [GRN0]  57.28,42.93 0 bottom
U$88  [#5V#0]  72.14,8.89 90 top
U$89  [#5V#6]  72.14,8.89 270 bottom
U$90  [#3V3#0]  74.68,8.89 90 top
U$91  [#3V3#0]  74.68,48.01 270 bottom
U$92  [#3V3#4]  74.68,8.89 270 bottom
U$93  [#3V3#4]  74.68,48.01 90 top
U$94  [#SDA##CS##0]  82.3,8.89 90 top
U$95  [#SDA##CS##0]  72.14,48.01 270 bottom
U$96  [#SDA##CS##1]  82.3,8.89 270 bottom
U$97  [#SDA##CS##1]  72.14,48.01 90 top
U$98  [#SCL#SCK#0]  89.92,8.89 90 top
U$99  [#SCL#SCK#0]  69.6,48.01 270 bottom
U$100  [#SCL#SCK#1]  69.6,48.01 90 top
U$101  [#SCL#SCK#1]  89.92,8.89 270 bottom
U$102  [##RESET##0]  87.38,48.01 90 top
U$103  [##RESET##1]  87.38,48.01 270 bottom
U$104  [#EXT_INT#0]  89.92,48.01 90 top
U$105  [#EXT_INT#1]  89.92,48.01 270 bottom
U$106  [PWR0]  96.27,25.91 0 top
U$107  [#PWR#0]  93.09,24 270 bottom
U$108  [#SPI#0]  77.98,20.83 270 bottom
U$109  [#I�C#0]  74.17,36.07 270 bottom
U$110  [#SHLD#0]  59.18,19.56 270 bottom
U$111  [#TXD1#POCI#0]  84.84,8.89 90 top
U$112  [#TXD1#POCI#0]  79.76,48.01 270 bottom
U$113  [#TXD1#POCI#2]  79.76,48.01 90 top
U$114  [#TXD1#POCI#2]  84.84,8.89 270 bottom
U$115  [#RXD1#PICO#0]  87.38,8.89 90 top
U$116  [#RXD1#PICO#0]  82.3,48.01 270 bottom
U$117  [#RXD1#PICO#2]  82.3,48.01 90 top
U$118  [#RXD1#PICO#2]  87.38,8.89 270 bottom
U$119  [#3V3#0]  57.66,33.53 0 top
U$120  [#3V3#0]  64.64,33.53 0 bottom
U$121  [#ANT_PWR#0]  92.46,48.01 90 top
U$122  [#ANT_PWR#1]  92.46,48.01 270 bottom
U$123  [NEO#F9P0]  72.14,28.45 270 bottom
U$124  [NEO#F9P0]  92.46,22.1 90 top
U$125  [#RTK_STAT#0]  84.84,43.05 90 top
U$126  [#_RTK_STAT#0]  84.84,42.93 270 bottom
U$127  [RTK0]  96.27,44.32 0 top
U$128  [#RTK#0]  91.19,37.34 270 bottom
U$129  [L1#L50]  95.12,38.61 0 top
U$130  [ANTENNA0]  95,37.34 0 top
U$131  [L1#L50]  74.68,28.45 270 bottom
U$132  [GNSS_RTK0]  77.22,28.45 270 bottom
U$133  [RECEIVER0]  79.76,28.45 270 bottom
U$134  [#LNA_EN#0]  67.06,40.26 270 bottom
U$135  [PPS0]  96.27,20.83 0 top
U$136  [#PPS#0]  93.09,17.14 270 bottom
U$137  [#_PPS#0]  92.46,10.67 90 top
U$138  [#PPS_#0]  92.46,10.67 270 bottom
U$139  [##SAFE##0]  84.84,22.61 270 bottom
U$140  [#G#0]  69.6,10.03 90 top
U$141  [#GND#0]  103.89,28.45 0 top
U$142  [#GND#0]  123.44,48.01 270 bottom
U$143  [#GND#1]  123.44,48.01 90 top
U$144  [#GND#1]  103.89,28.45 0 bottom
U$145  [#GND#1]  115.82,8.89 270 bottom
U$146  [#TXD2#0]  103.89,38.61 0 top
U$147  [#TXD2#0]  125.98,8.89 90 top
U$148  [#TXD2#3]  125.98,8.89 270 bottom
U$149  [#TXD2#3]  103.89,38.61 0 bottom
U$150  [#RXD2#0]  123.44,8.89 90 top
U$151  [#RXD2#0]  103.89,36.07 0 top
U$152  [#RXD2#3]  103.89,36.07 0 bottom
U$153  [#RXD2#3]  123.44,8.89 270 bottom
U$154  [BLK0]  103.5,26.67 0 top
U$155  [BLK0]  103.5,26.67 0 bottom
U$156  [GRN0]  103.63,42.93 0 top
U$157  [GRN0]  103.5,42.93 0 bottom
U$158  [#5V#0]  118.36,8.89 90 top
U$159  [#5V#6]  118.36,8.89 270 bottom
U$160  [#3V3#0]  120.9,8.89 90 top
U$161  [#3V3#0]  120.9,48.01 270 bottom
U$162  [#3V3#4]  120.9,8.89 270 bottom
U$163  [#3V3#4]  120.9,48.01 90 top
U$164  [#SDA##CS##0]  128.52,8.89 90 top
U$165  [#SDA##CS##0]  118.36,48.01 270 bottom
U$166  [#SDA##CS##1]  128.52,8.89 270 bottom
U$167  [#SDA##CS##1]  118.36,48.01 90 top
U$168  [#SCL#SCK#0]  136.14,8.89 90 top
U$169  [#SCL#SCK#0]  115.82,48.01 270 bottom
U$170  [#SCL#SCK#1]  115.82,48.01 90 top
U$171  [#SCL#SCK#1]  136.14,8.89 270 bottom
U$172  [##RESET##0]  133.6,48.01 90 top
U$173  [##RESET##1]  133.6,48.01 270 bottom
U$174  [#EXT_INT#0]  136.14,48.01 90 top
U$175  [#EXT_INT#1]  136.14,48.01 270 bottom
U$176  [PWR0]  142.49,25.91 0 top
U$177  [#PWR#0]  139.32,24 270 bottom
U$178  [#SPI#0]  124.21,20.83 270 bottom
U$179  [#I�C#0]  120.4,36.07 270 bottom
U$180  [#SHLD#0]  105.41,19.56 270 bottom
U$181  [#TXD1#POCI#0]  131.06,8.89 90 top
U$182  [#TXD1#POCI#0]  125.98,48.01 270 bottom
U$183  [#TXD1#POCI#2]  125.98,48.01 90 top
U$184  [#TXD1#POCI#2]  131.06,8.89 270 bottom
U$185  [#RXD1#PICO#0]  133.6,8.89 90 top
U$186  [#RXD1#PICO#0]  128.52,48.01 270 bottom
U$187  [#RXD1#PICO#2]  128.52,48.01 90 top
U$188  [#RXD1#PICO#2]  133.6,8.89 270 bottom
U$189  [#3V3#0]  103.89,33.53 0 top
U$190  [#3V3#0]  110.87,33.53 0 bottom
U$191  [#ANT_PWR#0]  138.68,48.01 90 top
U$192  [#ANT_PWR#1]  138.68,48.01 270 bottom
U$193  [NEO#F9P0]  118.36,28.45 270 bottom
U$194  [NEO#F9P0]  138.68,22.1 90 top
U$195  [#RTK_STAT#0]  131.06,43.05 90 top
U$196  [#_RTK_STAT#0]  131.06,42.93 270 bottom
U$197  [RTK0]  142.49,44.32 0 top
U$198  [#RTK#0]  137.41,37.34 270 bottom
U$199  [L1#L50]  141.35,38.61 0 top
U$200  [ANTENNA0]  141.22,37.34 0 top
U$201  [L1#L50]  120.9,28.45 270 bottom
U$202  [GNSS_RTK0]  123.44,28.45 270 bottom
U$203  [RECEIVER0]  125.98,28.45 270 bottom
U$204  [#LNA_EN#0]  113.28,40.26 270 bottom
U$205  [PPS0]  142.49,20.83 0 top
U$206  [#PPS#0]  139.32,17.14 270 bottom
U$207  [#_PPS#0]  138.68,10.67 90 top
U$208  [#PPS_#0]  138.68,10.67 270 bottom
U$209  [##SAFE##0]  131.06,22.61 270 bottom
U$210  [#G#0]  115.82,10.03 90 top
U$211  [#GND#0]  11.43,72.14 0 top
U$212  [#GND#0]  30.99,91.69 270 bottom
U$213  [#GND#1]  30.99,91.69 90 top
U$214  [#GND#1]  11.43,72.14 0 bottom
U$215  [#GND#1]  23.37,52.58 270 bottom
U$216  [#TXD2#0]  11.43,82.3 0 top
U$217  [#TXD2#0]  33.53,52.58 90 top
U$218  [#TXD2#3]  33.53,52.58 270 bottom
U$219  [#TXD2#3]  11.43,82.3 0 bottom
U$220  [#RXD2#0]  30.99,52.58 90 top
U$221  [#RXD2#0]  11.43,79.76 0 top
U$222  [#RXD2#3]  11.43,79.76 0 bottom
U$223  [#RXD2#3]  30.99,52.58 270 bottom
U$224  [BLK0]  11.05,70.36 0 top
U$225  [BLK0]  11.05,70.36 0 bottom
U$226  [GRN0]  11.18,86.61 0 top
U$227  [GRN0]  11.05,86.61 0 bottom
U$228  [#5V#0]  25.91,52.58 90 top
U$229  [#5V#6]  25.91,52.58 270 bottom
U$230  [#3V3#0]  28.45,52.58 90 top
U$231  [#3V3#0]  28.45,91.69 270 bottom
U$232  [#3V3#4]  28.45,52.58 270 bottom
U$233  [#3V3#4]  28.45,91.69 90 top
U$234  [#SDA##CS##0]  36.07,52.58 90 top
U$235  [#SDA##CS##0]  25.91,91.69 270 bottom
U$236  [#SDA##CS##1]  36.07,52.58 270 bottom
U$237  [#SDA##CS##1]  25.91,91.69 90 top
U$238  [#SCL#SCK#0]  43.69,52.58 90 top
U$239  [#SCL#SCK#0]  23.37,91.69 270 bottom
U$240  [#SCL#SCK#1]  23.37,91.69 90 top
U$241  [#SCL#SCK#1]  43.69,52.58 270 bottom
U$242  [##RESET##0]  41.15,91.69 90 top
U$243  [##RESET##1]  41.15,91.69 270 bottom
U$244  [#EXT_INT#0]  43.69,91.69 90 top
U$245  [#EXT_INT#1]  43.69,91.69 270 bottom
U$246  [PWR0]  50.04,69.6 0 top
U$247  [#PWR#0]  46.86,67.69 270 bottom
U$248  [#SPI#0]  31.75,64.52 270 bottom
U$249  [#I�C#0]  27.94,79.76 270 bottom
U$250  [#SHLD#0]  12.95,63.25 270 bottom
U$251  [#TXD1#POCI#0]  38.61,52.58 90 top
U$252  [#TXD1#POCI#0]  33.53,91.69 270 bottom
U$253  [#TXD1#POCI#2]  33.53,91.69 90 top
U$254  [#TXD1#POCI#2]  38.61,52.58 270 bottom
U$255  [#RXD1#PICO#0]  41.15,52.58 90 top
U$256  [#RXD1#PICO#0]  36.07,91.69 270 bottom
U$257  [#RXD1#PICO#2]  36.07,91.69 90 top
U$258  [#RXD1#PICO#2]  41.15,52.58 270 bottom
U$259  [#3V3#0]  11.43,77.22 0 top
U$260  [#3V3#0]  18.41,77.22 0 bottom
U$261  [#ANT_PWR#0]  46.23,91.69 90 top
U$262  [#ANT_PWR#1]  46.23,91.69 270 bottom
U$263  [NEO#F9P0]  25.91,72.14 270 bottom
U$264  [NEO#F9P0]  46.23,65.79 90 top
U$265  [#RTK_STAT#0]  38.61,86.74 90 top
U$266  [#_RTK_STAT#0]  38.61,86.61 270 bottom
U$267  [RTK0]  50.04,88.01 0 top
U$268  [#RTK#0]  44.96,81.03 270 bottom
U$269  [L1#L50]  48.89,82.3 0 top
U$270  [ANTENNA0]  48.77,81.03 0 top
U$271  [L1#L50]  28.45,72.14 270 bottom
U$272  [GNSS_RTK0]  30.99,72.14 270 bottom
U$273  [RECEIVER0]  33.53,72.14 270 bottom
U$274  [#LNA_EN#0]  20.83,83.95 270 bottom
U$275  [PPS0]  50.04,64.52 0 top
U$276  [#PPS#0]  46.86,60.83 270 bottom
U$277  [#_PPS#0]  46.23,54.36 90 top
U$278  [#PPS_#0]  46.23,54.36 270 bottom
U$279  [##SAFE##0]  38.61,66.29 270 bottom
U$280  [#G#0]  23.37,53.72 90 top
U$281  [#GND#0]  57.66,72.14 0 top
U$282  [#GND#0]  77.22,91.69 270 bottom
U$283  [#GND#1]  77.22,91.69 90 top
U$284  [#GND#1]  57.66,72.14 0 bottom
U$285  [#GND#1]  69.6,52.58 270 bottom
U$286  [#TXD2#0]  57.66,82.3 0 top
U$287  [#TXD2#0]  79.76,52.58 90 top
U$288  [#TXD2#3]  79.76,52.58 270 bottom
U$289  [#TXD2#3]  57.66,82.3 0 bottom
U$290  [#RXD2#0]  77.22,52.58 90 top
U$291  [#RXD2#0]  57.66,79.76 0 top
U$292  [#RXD2#3]  57.66,79.76 0 bottom
U$293  [#RXD2#3]  77.22,52.58 270 bottom
U$294  [BLK0]  57.28,70.36 0 top
U$295  [BLK0]  57.28,70.36 0 bottom
U$296  [GRN0]  57.4,86.61 0 top
U$297  [GRN0]  57.28,86.61 0 bottom
U$298  [#5V#0]  72.14,52.58 90 top
U$299  [#5V#6]  72.14,52.58 270 bottom
U$300  [#3V3#0]  74.68,52.58 90 top
U$301  [#3V3#0]  74.68,91.69 270 bottom
U$302  [#3V3#4]  74.68,52.58 270 bottom
U$303  [#3V3#4]  74.68,91.69 90 top
U$304  [#SDA##CS##0]  82.3,52.58 90 top
U$305  [#SDA##CS##0]  72.14,91.69 270 bottom
U$306  [#SDA##CS##1]  82.3,52.58 270 bottom
U$307  [#SDA##CS##1]  72.14,91.69 90 top
U$308  [#SCL#SCK#0]  89.92,52.58 90 top
U$309  [#SCL#SCK#0]  69.6,91.69 270 bottom
U$310  [#SCL#SCK#1]  69.6,91.69 90 top
U$311  [#SCL#SCK#1]  89.92,52.58 270 bottom
U$312  [##RESET##0]  87.38,91.69 90 top
U$313  [##RESET##1]  87.38,91.69 270 bottom
U$314  [#EXT_INT#0]  89.92,91.69 90 top
U$315  [#EXT_INT#1]  89.92,91.69 270 bottom
U$316  [PWR0]  96.27,69.6 0 top
U$317  [#PWR#0]  93.09,67.69 270 bottom
U$318  [#SPI#0]  77.98,64.52 270 bottom
U$319  [#I�C#0]  74.17,79.76 270 bottom
U$320  [#SHLD#0]  59.18,63.25 270 bottom
U$321  [#TXD1#POCI#0]  84.84,52.58 90 top
U$322  [#TXD1#POCI#0]  79.76,91.69 270 bottom
U$323  [#TXD1#POCI#2]  79.76,91.69 90 top
U$324  [#TXD1#POCI#2]  84.84,52.58 270 bottom
U$325  [#RXD1#PICO#0]  87.38,52.58 90 top
U$326  [#RXD1#PICO#0]  82.3,91.69 270 bottom
U$327  [#RXD1#PICO#2]  82.3,91.69 90 top
U$328  [#RXD1#PICO#2]  87.38,52.58 270 bottom
U$329  [#3V3#0]  57.66,77.22 0 top
U$330  [#3V3#0]  64.64,77.22 0 bottom
U$331  [#ANT_PWR#0]  92.46,91.69 90 top
U$332  [#ANT_PWR#1]  92.46,91.69 270 bottom
U$333  [NEO#F9P0]  72.14,72.14 270 bottom
U$334  [NEO#F9P0]  92.46,65.79 90 top
U$335  [#RTK_STAT#0]  84.84,86.74 90 top
U$336  [#_RTK_STAT#0]  84.84,86.61 270 bottom
U$337  [RTK0]  96.27,88.01 0 top
U$338  [#RTK#0]  91.19,81.03 270 bottom
U$339  [L1#L50]  95.12,82.3 0 top
U$340  [ANTENNA0]  95,81.03 0 top
U$341  [L1#L50]  74.68,72.14 270 bottom
U$342  [GNSS_RTK0]  77.22,72.14 270 bottom
U$343  [RECEIVER0]  79.76,72.14 270 bottom
U$344  [#LNA_EN#0]  67.06,83.95 270 bottom
U$345  [PPS0]  96.27,64.52 0 top
U$346  [#PPS#0]  93.09,60.83 270 bottom
U$347  [#_PPS#0]  92.46,54.36 90 top
U$348  [#PPS_#0]  92.46,54.36 270 bottom
U$349  [##SAFE##0]  84.84,66.29 270 bottom
U$350  [#G#0]  69.6,53.72 90 top
U$351  [#GND#0]  103.89,72.14 0 top
U$352  [#GND#0]  123.44,91.69 270 bottom
U$353  [#GND#1]  123.44,91.69 90 top
U$354  [#GND#1]  103.89,72.14 0 bottom
U$355  [#GND#1]  115.82,52.58 270 bottom
U$356  [#TXD2#0]  103.89,82.3 0 top
U$357  [#TXD2#0]  125.98,52.58 90 top
U$358  [#TXD2#3]  125.98,52.58 270 bottom
U$359  [#TXD2#3]  103.89,82.3 0 bottom
U$360  [#RXD2#0]  123.44,52.58 90 top
U$361  [#RXD2#0]  103.89,79.76 0 top
U$362  [#RXD2#3]  103.89,79.76 0 bottom
U$363  [#RXD2#3]  123.44,52.58 270 bottom
U$364  [BLK0]  103.5,70.36 0 top
U$365  [BLK0]  103.5,70.36 0 bottom
U$366  [GRN0]  103.63,86.61 0 top
U$367  [GRN0]  103.5,86.61 0 bottom
U$368  [#5V#0]  118.36,52.58 90 top
U$369  [#5V#6]  118.36,52.58 270 bottom
U$370  [#3V3#0]  120.9,52.58 90 top
U$371  [#3V3#0]  120.9,91.69 270 bottom
U$372  [#3V3#4]  120.9,52.58 270 bottom
U$373  [#3V3#4]  120.9,91.69 90 top
U$374  [#SDA##CS##0]  128.52,52.58 90 top
U$375  [#SDA##CS##0]  118.36,91.69 270 bottom
U$376  [#SDA##CS##1]  128.52,52.58 270 bottom
U$377  [#SDA##CS##1]  118.36,91.69 90 top
U$378  [#SCL#SCK#0]  136.14,52.58 90 top
U$379  [#SCL#SCK#0]  115.82,91.69 270 bottom
U$380  [#SCL#SCK#1]  115.82,91.69 90 top
U$381  [#SCL#SCK#1]  136.14,52.58 270 bottom
U$382  [##RESET##0]  133.6,91.69 90 top
U$383  [##RESET##1]  133.6,91.69 270 bottom
U$384  [#EXT_INT#0]  136.14,91.69 90 top
U$385  [#EXT_INT#1]  136.14,91.69 270 bottom
U$386  [PWR0]  142.49,69.6 0 top
U$387  [#PWR#0]  139.32,67.69 270 bottom
U$388  [#SPI#0]  124.21,64.52 270 bottom
U$389  [#I�C#0]  120.4,79.76 270 bottom
U$390  [#SHLD#0]  105.41,63.25 270 bottom
U$391  [#TXD1#POCI#0]  131.06,52.58 90 top
U$392  [#TXD1#POCI#0]  125.98,91.69 270 bottom
U$393  [#TXD1#POCI#2]  125.98,91.69 90 top
U$394  [#TXD1#POCI#2]  131.06,52.58 270 bottom
U$395  [#RXD1#PICO#0]  133.6,52.58 90 top
U$396  [#RXD1#PICO#0]  128.52,91.69 270 bottom
U$397  [#RXD1#PICO#2]  128.52,91.69 90 top
U$398  [#RXD1#PICO#2]  133.6,52.58 270 bottom
U$399  [#3V3#0]  103.89,77.22 0 top
U$400  [#3V3#0]  110.87,77.22 0 bottom
U$401  [#ANT_PWR#0]  138.68,91.69 90 top
U$402  [#ANT_PWR#1]  138.68,91.69 270 bottom
U$403  [NEO#F9P0]  118.36,72.14 270 bottom
U$404  [NEO#F9P0]  138.68,65.79 90 top
U$405  [#RTK_STAT#0]  131.06,86.74 90 top
U$406  [#_RTK_STAT#0]  131.06,86.61 270 bottom
U$407  [RTK0]  142.49,88.01 0 top
U$408  [#RTK#0]  137.41,81.03 270 bottom
U$409  [L1#L50]  141.35,82.3 0 top
U$410  [ANTENNA0]  141.22,81.03 0 top
U$411  [L1#L50]  120.9,72.14 270 bottom
U$412  [GNSS_RTK0]  123.44,72.14 270 bottom
U$413  [RECEIVER0]  125.98,72.14 270 bottom
U$414  [#LNA_EN#0]  113.28,83.95 270 bottom
U$415  [PPS0]  142.49,64.52 0 top
U$416  [#PPS#0]  139.32,60.83 270 bottom
U$417  [#_PPS#0]  138.68,54.36 90 top
U$418  [#PPS_#0]  138.68,54.36 270 bottom
U$419  [##SAFE##0]  131.06,66.29 270 bottom
U$420  [#G#0]  115.82,53.72 90 top

## Library data of the parts
3V1-3V6 I2C I2C1-I2C5 PULSE PULSE1-PULSE5 PWR\ PWR\1-PWR\5 RTK RTK1-RTK5 SHLD SHLD1-SHLD5 SPI SPI1-SPI5 = SparkFun-Jumpers
B1-B6 = SparkFun-Batteries; PROD_ID: BATT-14267
C1 C7 C12 C15 C20 C23 C28 C31 C36 C39 C44 C47 = SparkFun-Capacitors; PROD_ID: CAP-08913
C2-C4 C6 C9 C11 C13 C14 C17 C19 C21 C22 C25 C27 C29 C30 C33 C35 C37 C38 C41 C43 C45 C46 = SparkFun-Capacitors; PROD_ID: CAP-00868
C5 C10 C18 C26 C34 C42 = SparkFun-Capacitors; PROD_ID: CAP-00810
C8 C16 C24 C32 C40 C48 = SparkFun-Capacitors; PROD_ID: CAP-13930
D1 D8 D14 D20 D26 D32 = SparkFun-DiscreteSemi; DIGIKEY_PART: PESD0402-140CT-ND; MOUSE_PART: 650-PESD0402-140; PROD_ID: DIO-15359
D2 D9 D15 D21 D27 D33 = SparkFun-DiscreteSemi; PROD_ID: IC-13538
D3 D11 D17 D23 D29 D35 = SparkFun-DiscreteSemi; PROD_ID: DIO-10955
D4 D7 D13 D19 D25 D31 = SparkFun-LED; PROD_ID: DIO-00819
D5 D10 D16 D22 D28 D34 = SparkFun-LED; PROD_ID: DIO-08575; VALUE: BLUE
D6 D12 D18 D24 D30 D36 = SparkFun-LED; PROD_ID: DIO-09003
E$1-E$4 LOGO1-LOGO24 = SparkFun-Aesthetics
E$5 E$6 = SparkFun-Retired
FB1-FB6 = SparkFun-Coils; PROD_ID: NDUC-13805
J1 J11 J18 J25 J32 J39 = SparkFun-RF; PROD_ID: CONN-08289
J2 J4 J8 J9 J15 J16 J22 J23 J29 J30 J36 J37 = SparkFun-Connectors; PROD_ID: CONN-13694
J3 J10 J17 J24 J31 J38 = SparkFun-Connectors; PROD_ID: CONN-14122
J5 J12 J19 J26 J33 J40 = SparkFun-Connectors; PROD_ID: CONN-08437
J6 J7 J13 J14 J20 J21 J27 J28 J34 J35 J41 J42 TP1-TP12 = SparkFun-Connectors
JP1-JP43 JP61 JP71 JP81 JP91 JP101 = SparkFun
L1-L6 = SparkFun-Coils
R1 R18 R26 R37 R45 R56 R64 R75 R83 R94 R102 R113 = SparkFun-Resistors; PROD_ID: RES-07856
R2-R6 R11 R15 R16 R20 R21 R24 R25 R32-R35 R39 R40 R43 R44 R51-R54 R58 R59 R62 R63 R70-R73 R77 R78 R81 R82 R89-R92 R96 R97 R100 R101 R108-R111 = SparkFun-Resistors; PROD_ID: RES-08270
R7 R8 R17 R19 R22 R23 R36 R38 R41 R42 R55 R57 R60 R61 R74 R76 R79 R80 R93 R95 R98 R99 R112 R114 = SparkFun-Resistors; PROD_ID: RES-08272
R9 R10 R27 R28 R46 R47 R65 R66 R84 R85 R103 R104 = SparkFun-Resistors; PROD_ID: RES-09334
R12 R13 R30 R31 R49 R50 R68 R69 R87 R88 R106 R107 = SparkFun-Resistors; PROD_ID: RES-12083
R14 R29 R48 R67 R86 R105 = SparkFun-Resistors; PROD_ID: RES-12581
U1 U4 U6 U8 U10 U12 = SparkFun-GPS; PROD_ID: IC-19498
U2 U3 U5 U7 U9 U11 = SparkFun-IC-Power; PROD_ID: VREG-12457
U$1-U$420 = output